# Altium PCB Catan_Dice_Tile.PcbDoc
Units mm, origin at the board's own origin, x right, y up, seen from the top; angles counter-clockwise.
Board outline 91.48 x 79.22 mm, 2 copper layers (Top Layer, Bottom Layer), stack 1.135 mm thick; 14 components, 0 nets, 28 pads, 0 vias.
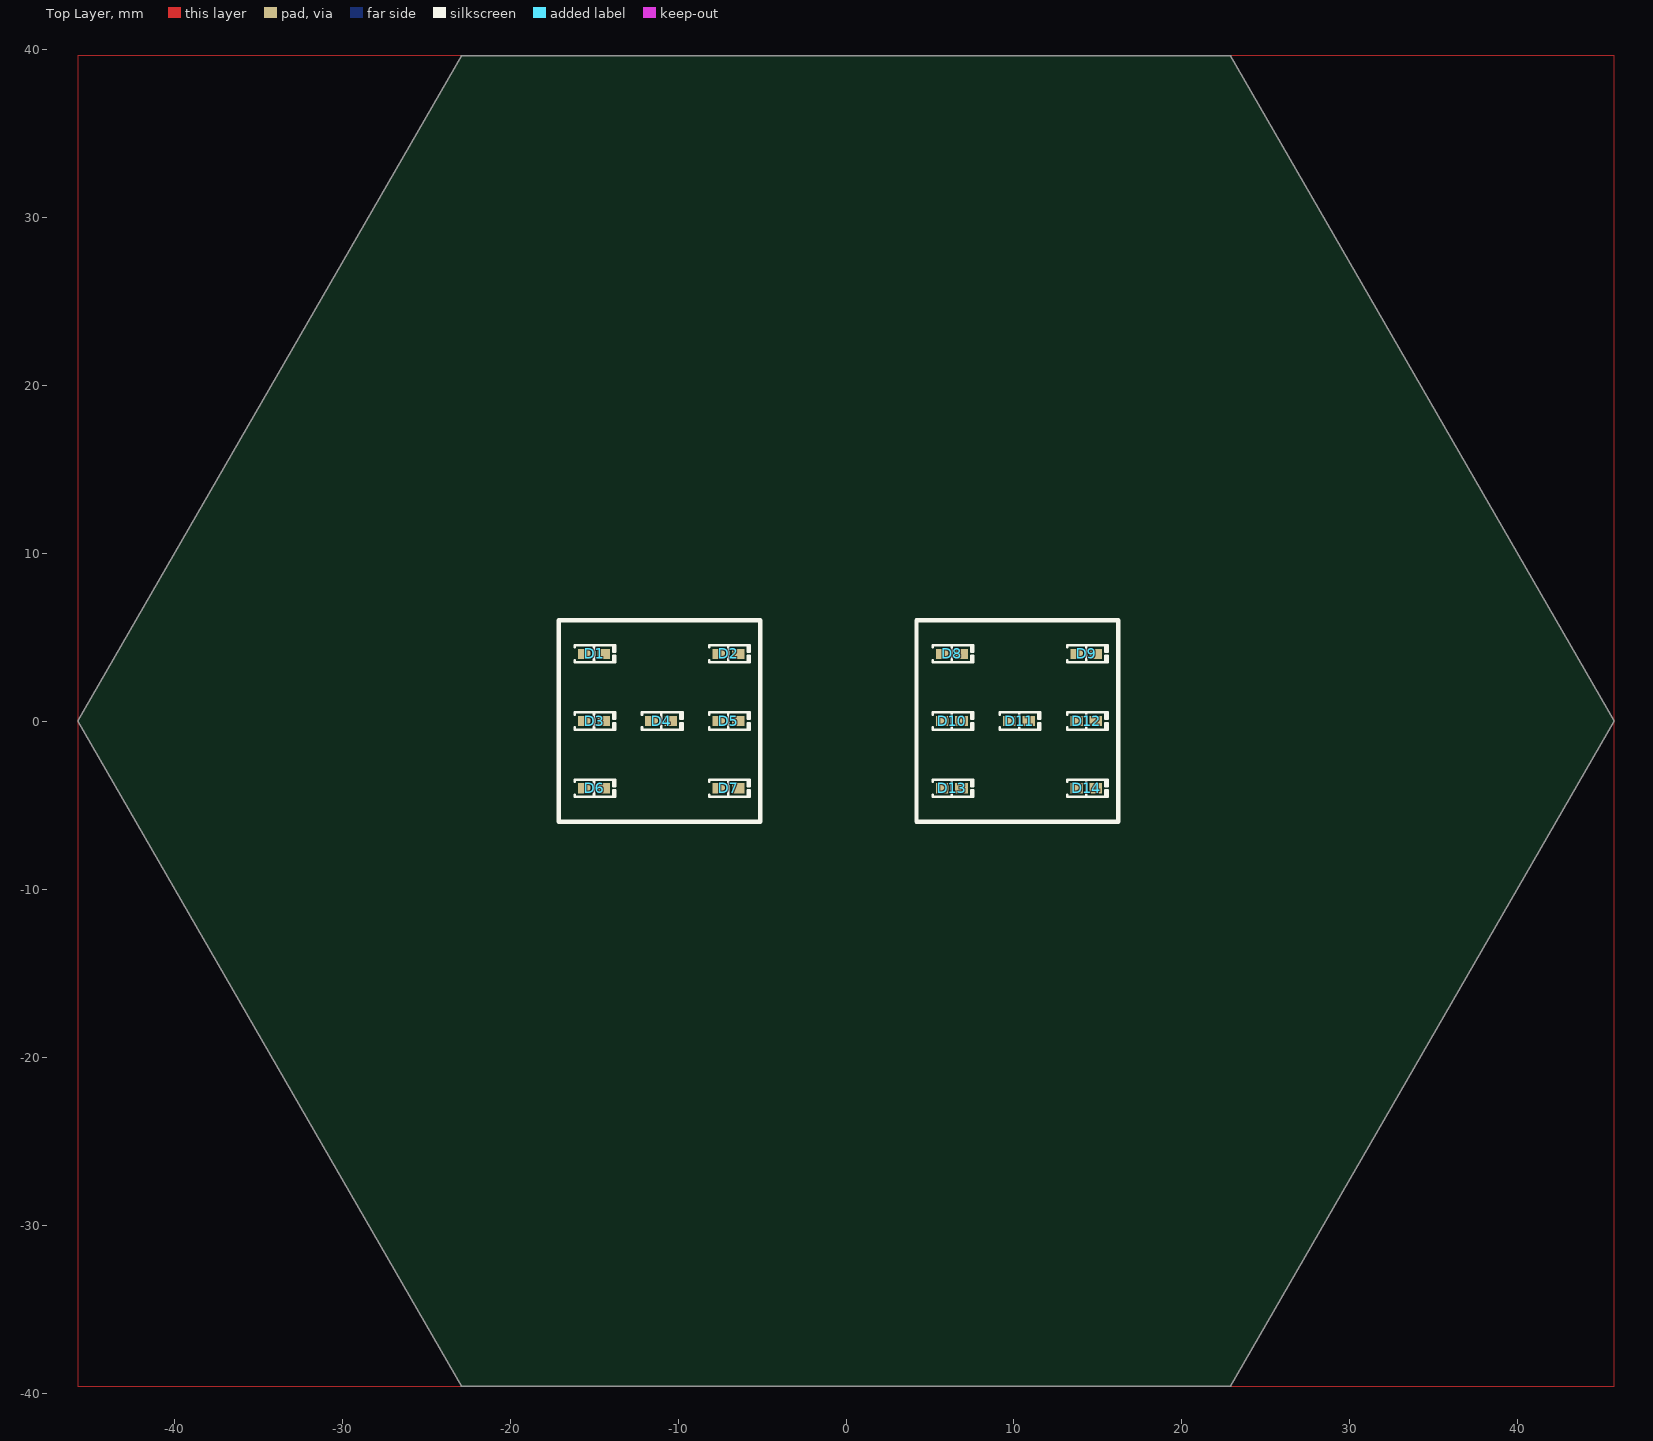
[diagram p0: Top Layer view]
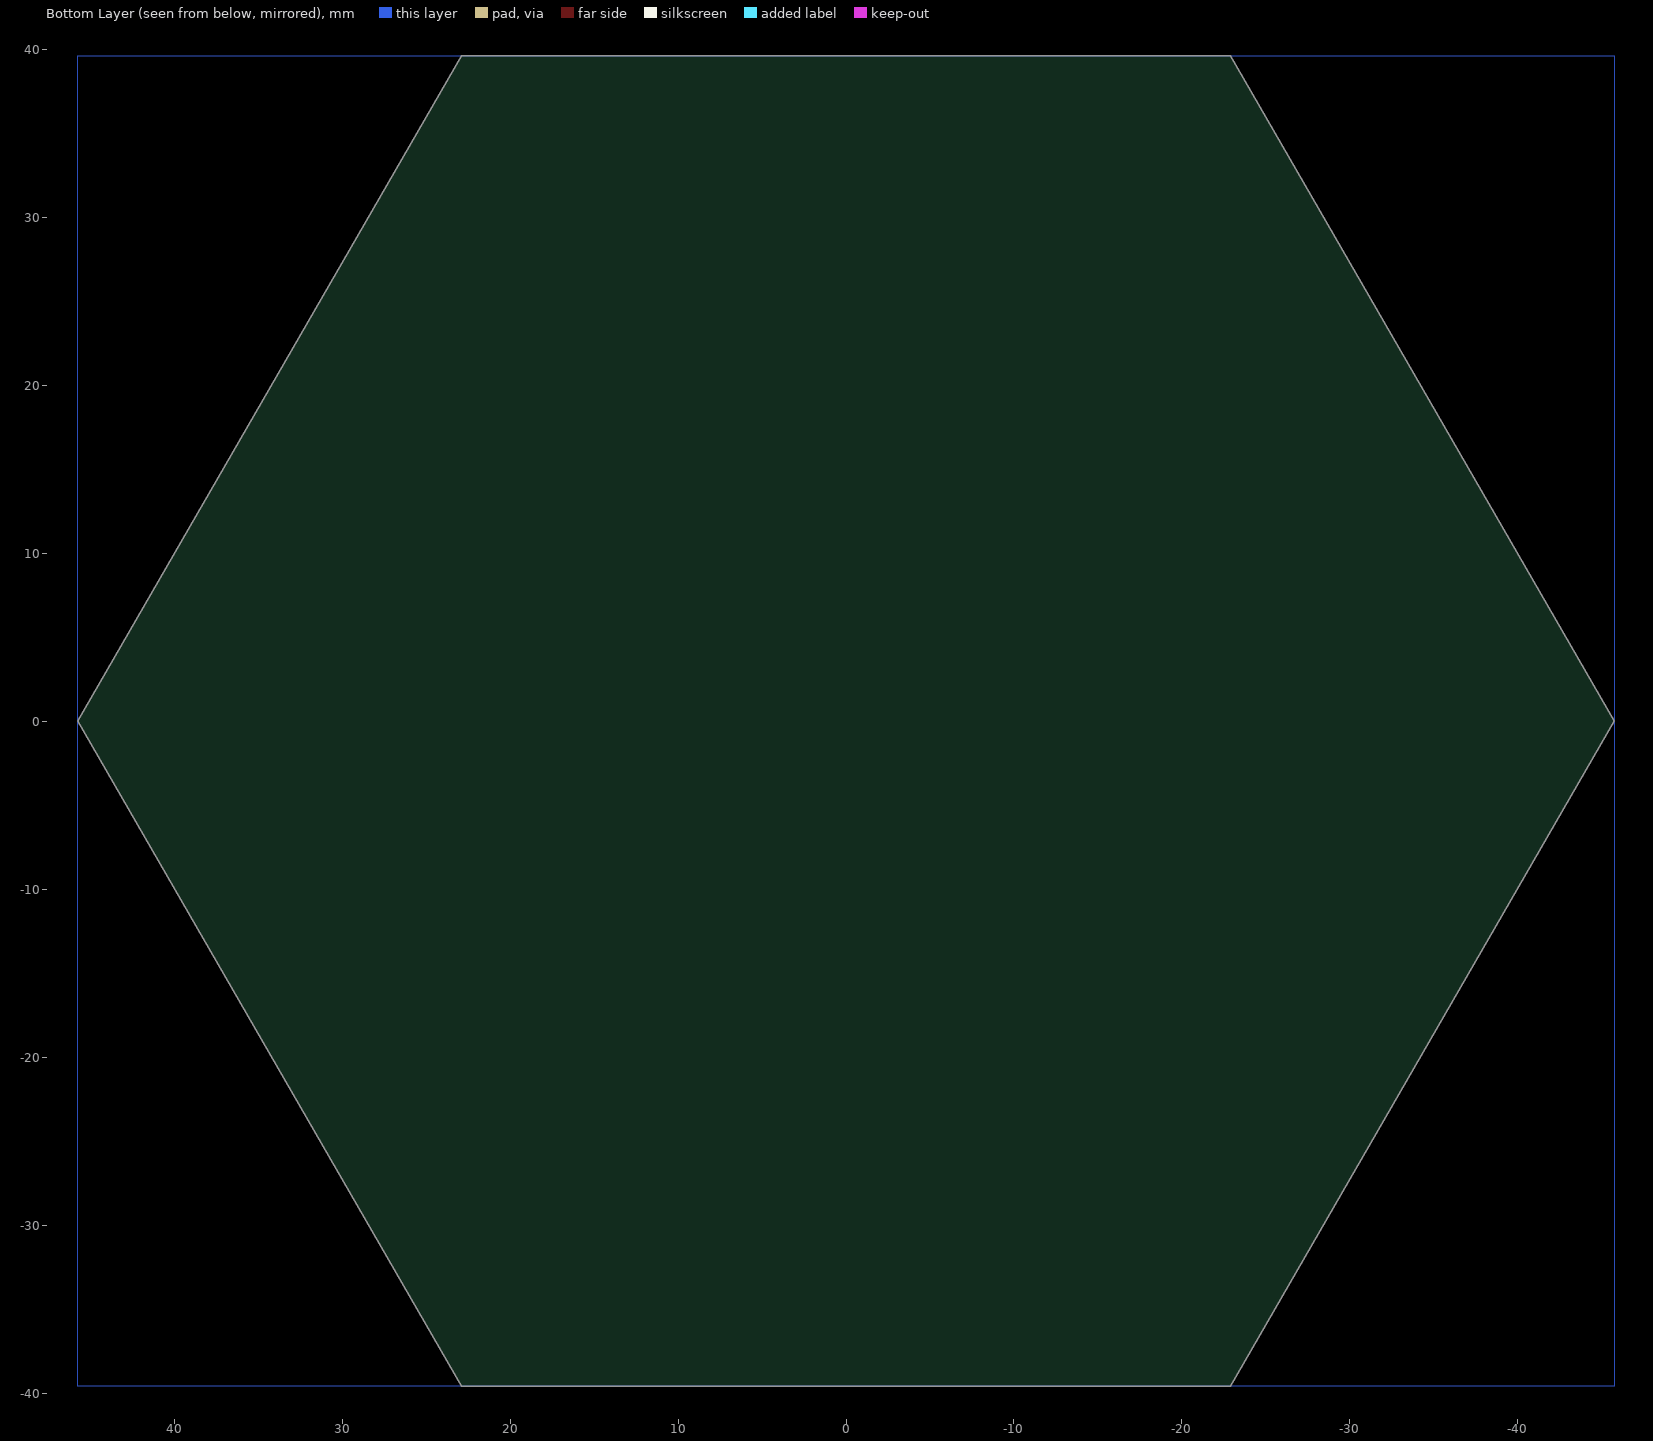
[diagram p1: Bottom Layer view, seen from below]

## Layer stack, top to bottom
Top Solder: solder mask 0.01, Solder Resist, Dk 3.5
Top Layer: signal copper 0.035
Dielectric 1: dielectric 1.065, FR-4, Dk 4.8
Bottom Layer: signal copper 0.035
Bottom Solder: solder mask 0.01, Solder Resist, Dk 3.5

## Board outline
-22.87,-39.61 -45.74,0 -22.87,39.61 22.87,39.61 45.74,0 22.87,-39.61

## Design rules (kind name [scope] priority, off if disabled: settings)
BoardOutlineClearance [OnLayer('Top Layer') Or (OnLayer('Bottom Layer')) Or (OnLayer('VBAT')) Or (OnLayer('Signal 1')) Or (OnLayer('Signal 2')) Or (OnLayer('Power')) Or (OnLayer('GND 1')) Or (OnLayer('GND 2')) Or (OnLayer('Multi-Layer'))] p1: gap=0.2 ignorepadtopadclearanceinfootprint=FALSE
Clearance "PolyGOn Pour CLearance" [InPolyGon] p1: gap=0.15 ignorepadtopadclearanceinfootprint=FALSE
Clearance [All] p2: gap=0.089 ignorepadtopadclearanceinfootprint=FALSE except(0.127: Arc-Via Track-Via SMDPad-Via THPad-Via Via-Via Via-Fill Via-Poly Via-Region Via-Text; 0.25: Arc-Hole Track-Hole SMDPad-Hole THPad-Hole Via-Hole Fill-Hole Poly-Hole Region-Hole Text-Hole)
HoleSize [All] p1: absolutevalues=TRUE maxlimit=6.3 minlimit=0.2 maxpercent=80.000 minpercent=20.000
PolygonConnect PolygonRelief [IsPolygon and not (IsNamedPolygon('PolygonDirect'))] p1: thpad.connectstyle=Relief thpad.reliefconductorwidth=0.254 thpad.reliefentries=4 thpad.polygonreliefangle="90 Angle" thpad.airgapwidth=0.254 smdpad.connectstyle=Relief smdpad.reliefconductorwidth=0.254 smdpad.reliefentries=4 smdpad.polygonreliefangle="90 Angle" smdpad.airgapwidth=0.254 via.connectstyle=Direct via.reliefconductorwidth=0.254 via.reliefentries=4 via.polygonreliefangle="90 Angle" via.airgapwidth=0.254
PolygonConnect [All] p2: connectstyle=Direct reliefconductorwidth=0.254 reliefentries=4 polygonreliefangle="90 Angle" airgapwidth=0.254
RoutingVias [All] p1: holewidth=0.3 width=0.55 viastyle="Through Hole" minholewidth=0.2 minwidth=0.45 maxholewidth=0.7 maxwidth=1.27
SolderMaskExpansion [All] p1: expansion=0.102 istentingtop=FALSE
Width [All] p1: maxlimit=5 minlimit=0.127 preferedwidth=0.254
29 further rules are at their usual default settings.

## Classes and differential pairs
component class Top: D1 D2 D3 D4 D5 D6 D7

## Components (designator, comment, footprint, x,y, rotation, side; value= is the part's Value field where it differs from the comment)
D1 "Red" "LED 0402_1005 RED" -15,4 r0 top
D2 "Red" "LED 0402_1005 RED" -7,4 r0 top
D3 "Red" "LED 0402_1005 RED" -15,0 r0 top
D4 "Red" "LED 0402_1005 RED" -11,0 r0 top
D5 "Red" "LED 0402_1005 RED" -7,0 r0 top
D6 "Red" "LED 0402_1005 RED" -15,-4 r0 top
D7 "Red" "LED 0402_1005 RED" -7,-4 r0 top
D8 "Red" "LED 0402_1005 RED" 6.3,4 r0 top (schematic designator D1)
D9 "Red" "LED 0402_1005 RED" 14.3,4 r0 top (schematic designator D2)
D10 "Red" "LED 0402_1005 RED" 6.3,0 r0 top (schematic designator D3)
D11 "Red" "LED 0402_1005 RED" 10.3,0 r0 top (schematic designator D4)
D12 "Red" "LED 0402_1005 RED" 14.3,0 r0 top (schematic designator D5)
D13 "Red" "LED 0402_1005 RED" 6.3,-4 r0 top (schematic designator D6)
D14 "Red" "LED 0402_1005 RED" 14.3,-4 r0 top (schematic designator D7)

## Footprints (in the part's own frame and the unit in brackets; to place one, negate y for a bottom-side part, rotate by r counter-clockwise, add the part's x,y. Pads: shape width x height; smd on the part's side, far side on the other; paste and mask are expansions set on the pad)
"LED 0402_1005 RED" [mm] "Chip Diode, 2-Leads, Body 1.00x0.50mm, IPC Medium Density"
  rect 0.75x0.6 smd: 1(-0.575,0) 2(0.575,0)
  silkscreen extent -1.14,-0.51 1.27,0.51, body extent -0.5,-0.25 0.5,0.25, height 0.21

## Part data
D1 D2 D3 D4 D5 D6 D7 D8 D9 D10 D11 D12 D13 D14: library part EAST10052RA1, "LED RED CLEAR 2SMD", Current - Test=5mA, Device Package="0402 (1005 Metric)", Lens Color=Colorless, Manufacturer="Everlight Electronics Co Ltd", Supplier Device Package=2-SMD, Supplier Part Number 1=1080-1559-1-ND, Voltage - Forward (Vf) (Typ)=2.05V, Color=Red, ComponentLink1Description=Datasheet, ComponentLink1URL=https://everlightamericas.com/index.php?controller=attachment&id_attachment=2715, ComponentLink2Description="DigiKey Link", ComponentLink2URL=https://www.digikey.com/en/products/detail/everlight-electronics-co-ltd/EAST10052RA1/8510368, Configuration=Standard, Height (Max)=0.25mm, LastUpdated="3/11/2024 7:51:34 AM", Lens Size="1.00mm x 0.50mm", Lens Style="Rectangle with Flat Top", Lens Transparency=Clear, Lifecycle Status=Active, Minimum Order=1, Mounting Type="Surface Mount", Package / Case="0402 (1005 Metric)", Packaging=TapeAndReel, Part Number=EAST10052RA1, Part Status=Active, PartId=502, Price=0.07, Series=-, Size / Dimension="1.00mm L x 0.50mm W", Supplier 1=DigiKey, Viewing Angle=120°, Wavelength - Peak=632nm

## Nets (pads, with @x,y where several pads share a name; then routed paths per layer and width w, separated by ;. In a path a pad name is that pad's centre, name@x,y a point inside that pad or via, vN(x,y) a via of type N, cw(c..) or ccw(c..) an arc to the next point about the centre after c; other vN are vias at no path point)
pads on no net: D1.1 D1.2 D2.1 D2.2 D3.1 D3.2 D4.1 D4.2 D5.1 D5.2 D6.1 D6.2 D7.1 D7.2 D8.1 D8.2 D9.1 D9.2 D10.1 D10.2 D11.1 D11.2 D12.1 D12.2 D13.1 D13.2 D14.1 D14.2

## Polygon pours and split planes (outlines as drawn)
no net on Top Layer "GND" (solid, shelved, pour order 0): -45.74,39.61 -45.74,-39.61 45.74,-39.61 45.74,39.61
no net on Bottom Layer "GND" (solid, shelved, pour order 1): -45.74,39.61 -45.74,-39.61 45.74,-39.61 45.74,39.61

## Silkscreen, mask and mechanical layers (free items; w line width, h text height)
Top Overlay:
  lines w0.254: -17.1,-6 -5.1,-6 -5.1,6 -17.1,6 -17.1,-6 ; 4.2,-6 16.2,-6 16.2,6 4.2,6 4.2,-6
Board Outline:
  the board outline again, w0.254